# EAGLE board ScanseSweepv1.1 (EAGLE 9.4.2)

Size 79.99 x 72.06 mm. Coordinates in mm from the lower left corner, seen from the top.
Outline: 0,0 79.99,0 79.99,72.06 0,72.06 0,0
Copper layers (1*16): Top 0.035mm / dielectric 1.5mm / Bottom 0.035mm
Design rules "default": minimum track width 6mil, minimum drill 0.35mm, track to track 6mil, track to pad 6mil, pad to pad 6mil, via to via 6mil, smd to smd 6mil, copper to edge 40mil, drill to drill 6mil, minimum pad ring 10mil, minimum via ring 8mil, stop-mask expansion 4mil, vias tented up to drill 0mil, thermal gap 10mil
Holes 2.8 mm at 5.63,65.46 54.63,65.46 5.63,7.46 54.63,7.46

## Footprints (pad centres in the part's own frame; a part is rotated, then mirrored left to right if it is on the bottom)
1X01 = drill 1.016 octagon: 1 0,0
C025-024X044 = drill 0.813 octagon: 1 -1.27,0; 2 1.27,0
XTAL_ECS-160-20-46X = drill 0.63 pad 1.03: 1 -1.25,0; 2 1.25,0
1X02 = drill 1.016 long: 1 -1.27,0; 2 1.27,0
SIP3 = drill 1 pad 1.676: 1 -2.54,0; 2 0,0; 3 2.54,0
SCREWTERMINAL-3.5MM-4 = drill 1.2 pad 2.032 square: 1 0,0 | drill 1.2 pad 2.032: 2 3.5,0; 3 7,0; 4 10.5,0
ARDUINO_MICRO = drill 1.016 pad 1.575: 3V3 6.35,1.27; +5V 31.75,1.27; A0 11.43,1.27; A1 13.97,1.27; A2 16.51,1.27; A3 19.05,1.27; A4 21.59,1.27; A5 24.13,1.27; D2 29.21,16.51; D3 26.67,16.51; D4 24.13,16.51; D5 21.59,16.51; D6 19.05,16.51; D7 16.51,16.51; D8 13.97,16.51; D9 11.43,16.51; D10 8.89,16.51; D11 6.35,16.51; D12 3.81,16.51; D13 3.81,1.27; GND 31.75,16.51; GND. 36.83,1.27; MISO] 41.91,1.27; MOSI 44.45,16.51; NC 26.67,1.27; NC. 29.21,1.27; REF 8.89,1.27; RST 34.29,16.51; RST. 34.29,1.27; RX1 36.83,16.51; SCK 44.45,1.27; SS 41.91,16.51; TX1 39.37,16.51; VIN 39.37,1.27 | drill 1.016 pad 1.575 octagon: 5V 40.64,6.477; GND_ 45.72,6.477; MISO. 40.64,3.937; MOSI. 43.18,6.477; RESET.. 45.72,3.937; SCK. 43.18,3.937 | smd 1.27 x 0.635: <USB>+V 3.15,10.947; <USB>D+ 3.15,9.957; <USB>D- 3.15,8.941; <USB>GND 3.15,6.96; <USB>ID 3.15,7.976 | hole 1.2: 1.27,1.27; 1.27,16.51; 46.99,16.51; 46.99,1.27
0204/5 = drill 0.813 octagon: 1 -2.54,0; 2 2.54,0
1X06 = drill 1.016 long: 1 -6.35,0; 2 -3.81,0; 3 -1.27,0; 4 1.27,0; 5 3.81,0; 6 6.35,0
DIL18 = drill 0.813 long: 1 -10.16,-3.81; 2 -7.62,-3.81; 3 -5.08,-3.81; 4 -2.54,-3.81; 5 0,-3.81; 6 2.54,-3.81; 7 5.08,-3.81; 8 7.62,-3.81; 9 10.16,-3.81; 10 10.16,3.81; 11 7.62,3.81; 12 5.08,3.81; 13 2.54,3.81; 14 0,3.81; 15 -2.54,3.81; 16 -5.08,3.81; 17 -7.62,3.81; 18 -10.16,3.81
DIL08 = drill 0.813 long: 1 -3.81,-3.81; 2 -1.27,-3.81; 3 1.27,-3.81; 4 3.81,-3.81; 5 3.81,3.81; 6 1.27,3.81; 7 -1.27,3.81; 8 -3.81,3.81

## Placement (x,y rotation side)
3.3V  [1X01]  48.26,6.35 0 top
5V  [1X01]  13.97,31.75 0 top
A5  [1X01]  16.51,20.32 0 top
C1  .1uF  [C025-024X044]  64.77,12.7 180 top
C2  0.1uF  [C025-024X044]  48.26,40.64 0 top
C3  0.1uF  [C025-024X044]  49.53,34.29 180 top
C4  0.1uF  [C025-024X044]  48.26,68.58 270 top
C5  0.1uF  [C025-024X044]  41.91,31.75 180 top
C6  0.1uf  [C025-024X044]  53.34,15.24 270 top
C7  0.1uF  [C025-024X044]  74.93,3.81 90 top
CAN_CLK  ECS-160-20-46X  [XTAL_ECS-160-20-46X]  66.04,31.75 0 top
CAN_SS_TEST  CAN_SS  [1X02]  8.89,44.45 270 top
D4  [1X01]  8.89,24.13 0 top
D9  [1X01]  13.97,11.43 0 top
D12  [1X01]  12.7,3.81 0 top
DC2  R-78C5.0-1.0  [SIP3]  43.18,16.51 270 top
J1  CAN-PLUG  [SCREWTERMINAL-3.5MM-4]  58.42,3.81 0 top
PCB1  ARDUINO_MICRO  [ARDUINO_MICRO]  38.1,0 90 top
R1  120  [0204/5]  58.42,11.43 180 top
R2  10k  [0204/5]  53.34,25.4 270 top
R3  1k  [0204/5]  44.45,63.5 270 top
R4  20k  [0204/5]  38.1,67.31 180 top
SCANSESWEEP  SCANSWEEP  [1X06]  27.94,58.42 0 top
U1  MCP2510P  [DIL18]  53.34,50.8 0 top
U$1  MCP2551MCP2551  [DIL08]  62.23,21.59 0 top
VIN_TEST  VIN  [1X02]  10.16,52.07 90 top

## Library data of the parts
3.3V 5V A5 CAN_SS_TEST D4 D9 D12 SCANSESWEEP VIN_TEST = pinhead
C1-C7 = rcl; SPICEPREFIX: C
CAN_CLK = ECS-160-20-46X; DESCRIPTION: Crystal 16MHz ±30ppm _Tol_ ±50ppm _Stability_ 20pF FUND 50Ohm; DIGI-KEY_PART_NUMBER: XC1759-ND; DIGI-KEY_PURCHASE_URL: https://www.digikey.com/product-detail/en/ecs-inc/ECS-160-20-46X/XC1759-ND/2676589?utm_source=snapeda&utm_medium=aggregator&utm_campaign=symbol; MF: ECS Inc.; MP: ECS-160-20-46X; PACKAGE: HC46/X ECS International
DC2 = dc-dc-converter
J1 = SparkFun-Connectors; PROD_ID: CONN-14485
PCB1 = E14_Arduino_revC
R1-R4 = rcl; SPICEPREFIX: R
U1 = microchip_can
U$1 = MCP2551

## Nets
3.3V: 3.3V.1 PCB1.3V3
5V: 5V.1 PCB1.+5V
5V-IN: C6.2 DC2.3 SCANSESWEEP.6
A5: A5.1 PCB1.A5
CAN_INT: PCB1.D7 U1.12
CAN_SS: CAN_SS_TEST.1 PCB1.D10 U1.16
CANH: J1.1 R1.2 U$1.7
CANL: J1.2 R1.1 U$1.6
D2: PCB1.D2 SCANSESWEEP.2
D3: PCB1.D3 SCANSESWEEP.1
D4: D4.1 PCB1.D4
D9: D9.1 PCB1.D9
D12: D12.1 PCB1.D12
GND: C1.2 C2.1 C3.2 C4.2 C5.2 C6.1 C7.1 CAN_SS_TEST.2 DC2.2 J1.3 PCB1.GND PCB1.GND. R2.1 SCANSESWEEP.5 U1.4 U1.5 U1.6 U$1.2 VIN_TEST.1
MISO: PCB1.MISO] U1.15
MOSI: PCB1.MOSI U1.14
N$13: C4.1 R3.1 R4.1
OSC1: C2.2 CAN_CLK.2 U1.8
OSC2: C3.1 CAN_CLK.1 U1.7
RESET: R3.2 U1.17
RS: R2.2 U$1.8
RX: PCB1.RX1 SCANSESWEEP.3
RXCAN: U1.2 U$1.4
SCK: PCB1.SCK U1.13
TX: PCB1.TX1 SCANSESWEEP.4
TXCAN: U1.1 U$1.1
VIN: C1.1 C5.1 C7.2 DC2.1 J1.4 PCB1.VIN R4.2 U$1.3 VIN_TEST.2

## Tracks (layer width: path | path; a pad name or v marks a point on that pad's centre or on a via)
3.3V  (1 unrouted)
5V  (1 unrouted)
5V-IN  (2 unrouted)
A5  (1 unrouted)
CAN_INT  (1 unrouted)
CAN_SS  (2 unrouted)
CANH  (2 unrouted)
CANL  (2 unrouted)
D2  (1 unrouted)
D3  (1 unrouted)
D4  (1 unrouted)
D9  (1 unrouted)
D12  (1 unrouted)
GND  (18 unrouted)
MISO  (1 unrouted)
MOSI  (1 unrouted)
N$13  (2 unrouted)
OSC1  (2 unrouted)
OSC2  (2 unrouted)
RESET  (1 unrouted)
RS  (1 unrouted)
RX  (1 unrouted)
RXCAN  (1 unrouted)
SCK  (1 unrouted)
TX  (1 unrouted)
TXCAN  (1 unrouted)
VIN  (8 unrouted)